# Altium PCB 0.73OLED.PcbDoc
Units mil, origin at the board's own origin, x right, y up, seen from the top; angles counter-clockwise.
Board outline 635 x 1045 mil, 2 copper layers (Top Layer, Bottom Layer); 17 components, 12 nets, 49 pads, 0 vias.
Unrouted connection lines stored in the file: 30.
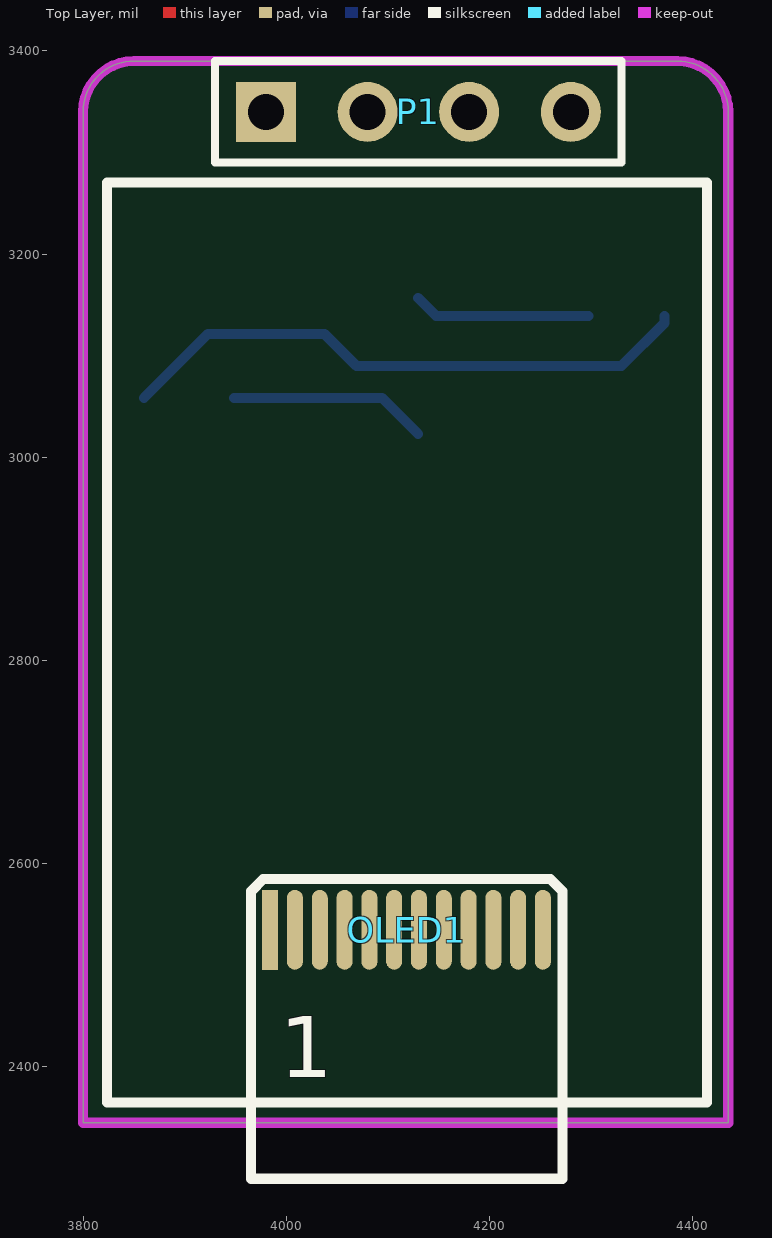
[diagram p0: Top Layer view]
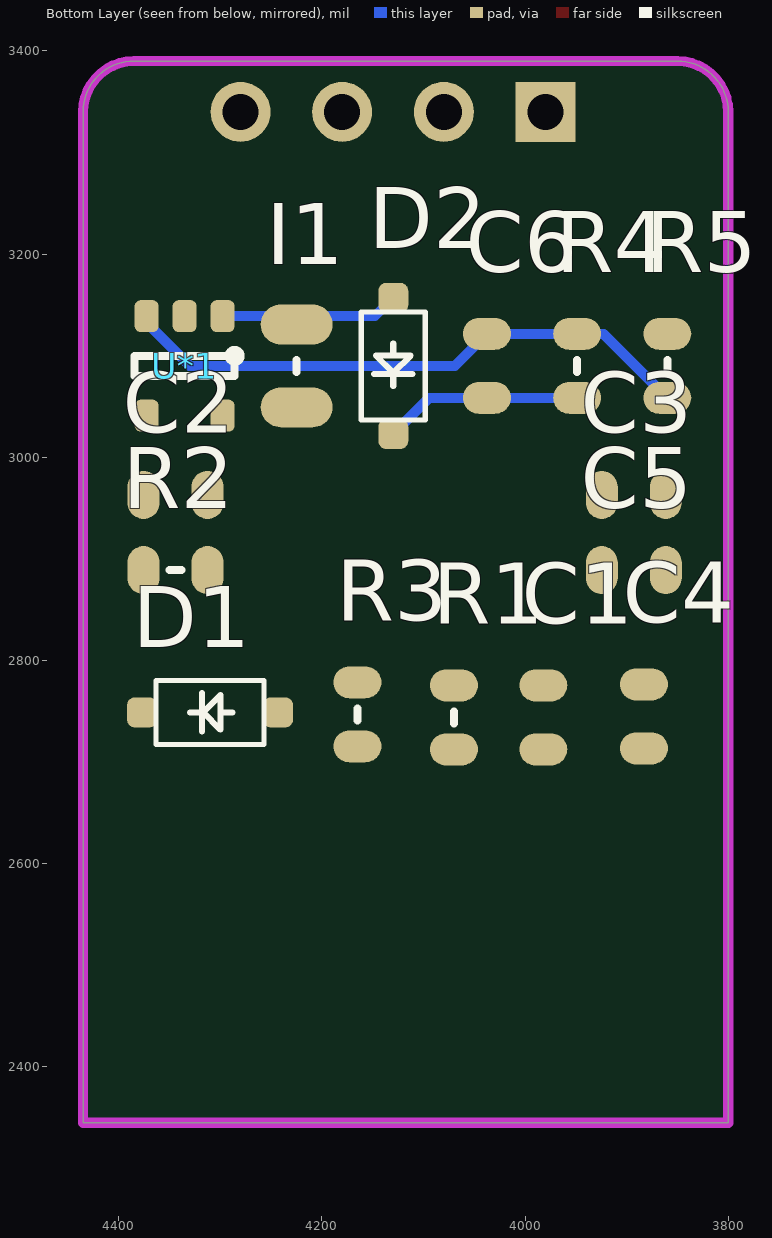
[diagram p1: Bottom Layer view, seen from below]

## Layer stack, top to bottom
Top Solder: solder mask 0.4, Solder Resist, Dk 3.5
Top Layer: signal copper 1.4
Dielectric 1: dielectric 12.6, FR-4, Dk 4.8
Bottom Layer: signal copper 1.4
Bottom Solder: solder mask 0.4, Solder Resist, Dk 3.5

## Board outline
3800,2345 4435,2345 4435,3340 ccw(c4385,3340) 4385,3390 3850,3390 ccw(c3850,3340) 3800,3340

## Design rules (kind name [scope] priority, off if disabled: settings)
Clearance [All] p1: gap=8 ignorepadtopadclearanceinfootprint=FALSE
PolygonConnect [All] p1: connectstyle=Relief reliefconductorwidth=10 reliefentries=4 polygonreliefangle="90 Angle" airgapwidth=10
RoutingVias [All] p1: holewidth=28 width=50 viastyle="Through Hole" minholewidth=28 minwidth=50 maxholewidth=28 maxwidth=50
SolderMaskExpansion [All] p1: expansion=4
Width [All] p1: maxlimit=10 minlimit=10 preferedwidth=10
30 further rules are at their usual default settings.

## Components (designator, comment, footprint, x,y, rotation, side; value= is the part's Value field where it differs from the comment)
C1 "0.1uF" 1__0603-CAP_ 3982,2744 r90 bottom value=104
C2 "4.7uF" 1__0603-CAP_ 4344,2963 r0 bottom value=104
C3 "0.1uF" 1__0603-CAP_ 3893,2963 r180 bottom value=104
C4 "4.7uF" 1__0603-CAP_ 3883,2745 r90 bottom value=104
C5 "4.7uF" 1__0603-CAP_ 3893,2889 r180 bottom value=104
C6 "4.7pF" 1__0603-CAP_ 4037.48,3090 r270 bottom value=104
D1 "Diode" 二极管1206 4310,2749 r180 bottom
D2 "Diode" 二极管1206 4129.7,3090 r90 bottom
I1 "6.8uH" 0805_Ind 4224.8,3090 r90 bottom value=100uH
OLED1 "0.73_OLED" 0.73OLED 4118.39,2260 r0 top
P1 "" HDR1X4 3980,3340 r0 top
R1 "220K" 1__0603-RES_ 4070,2744 r90 bottom value=10K
R2 "510K" 1__0603-RES_ 4344,2889 r0 bottom value=10K
R3 "510K" 1__0603-RES_ 4165,2747 r90 bottom value=10K
R4 "1.43M" 1__0603-RES_ 3948.74,3090 r90 bottom value=10K
R5 "205K" 1__0603-RES_ 3860,3090 r90 bottom value=10K
U*1 "OLED升压" 1__SOT23-5 4335,3090 r270 bottom

## Footprints (in the part's own frame and the unit in brackets; to place one, negate y for a bottom-side part, rotate by r counter-clockwise, add the part's x,y. Pads: shape width x height; smd on the part's side, far side on the other; paste and mask are expansions set on the pad)
0.73OLED [mm]
  rect 0.4x2 smd: 1(-3.41,6.985)
  oval 0.4x2 smd: 2(-2.79,6.985) 3(-2.17,6.985) 4(-1.55,6.985) 5(-0.93,6.985) 6(-0.31,6.985) 7(0.31,6.985) 8(0.93,6.985) 9(1.55,6.985) 10(2.17,6.985) 11(2.79,6.985) 12(3.41,6.985)
  silkscreen extent -7.49,0.76 7.51,25.67
1__0603-CAP_ [mm]
  oval 0.8x1.2 smd: 1(-0.8,0) 2(0.8,0)
  body extent -0.88,-0.48 0.87,0.48, height 0.85
1__0603-RES_ [mm]
  oval 0.8x1.2 smd: 1(-0.8,0) 2(0.8,0)
  silkscreen extent -0.15,0 0.15,0, body extent -0.8,-0.4 0.8,0.4, height 0.45
1__SOT23-5 [mm]
  rrect50% 0.8x0.6 smd: 1(-1.245,0.95) 2(-1.245,0) 3(-1.245,-0.95) 4(1.245,-0.95) 5(1.245,0.95)
  silkscreen extent -0.37,-1.25 0.25,1.37, body extent -1.42,-1.46 1.42,1.46
0805_Ind [mm]
  oval 1x1.8 smd: 1(-1.035,0) 2(1.035,0)
  silkscreen extent -0.15,0 0.15,0, body extent -1,-0.63 1,0.63, height 0.25
HDR1X4 [mm] "Connector; Header; 4 Position"
  rect 1.5x1.5 hole 0.9: 1(0,0)
  round 1.5 hole 0.9: 2(2.54,0) 3(5.08,0) 4(7.62,0)
  silkscreen extent -1.27,-1.27 8.89,1.27
二极管1206 [mm]
  rrect50% 0.75x0.75 smd: 1(1.7,0) 2(-1.7,0)
  silkscreen extent -1.35,-0.8 1.35,0.8

## Part data
C1 C2 C3 C4 C5 C6: library part Cap, "Capacitor"
D1 D2: "Default Diode", Code_JEDEC=DO-214-AB, LatestRevisionDate=17-Jul-2002, LatestRevisionNote="Re-released for DXP Platform.", PackageDescription="DO-214-AB/SMC; 2 C-Bend Leads; Body 7.9 x 5.9 mm, inc. leads (LxW)", PackageReference=SMC, PackageVersion=Sep-1996, Published=8-Jun-2000, Publisher="Altium Limited"
I1: library part 电感
P1: library part "Header 4", "Header, 4-Pin"
R1 R2 R3 R4 R5: library part Res2, "Resistor"
U*1: library part TPS61040

## Nets (pads, with @x,y where several pads share a name; then routed paths per layer and width w, separated by ;. In a path a pad name is that pad's centre, name@x,y a point inside that pad or via, vN(x,y) a via of type N, cw(c..) or ccw(c..) an arc to the next point about the centre after c; other vN are vias at no path point)
GND: C1.2 C2.2 C3.2 C4.2 C5.2 OLED1.3 OLED1.5 OLED1.8 P1.1 R3.2 R5.2 U*1.2
NetC2_1: C2.1 D1.1 OLED1.9 R2.1
NetC3_1: C3.1 C5.1 C6.2 D2.2 OLED1.1 R4.1 | length 195.6
  Bottom Layer w10: R4.1 4094.27,3058.5 D2.2
NetC4_1: C4.1 OLED1.2
NetC6_1: C6.1 R4.2 R5.1 U*1.3 | length 575.7
  Bottom Layer w10: R5.1 3922.99,3121.5 C6.1 4068.98,3090 4330,3090 4372.4,3132.4 U*1.3
NetD1_2: D1.2 R2.2
NetD2_1: D2.1 I1.2 U*1.1 | length 175.3
  Bottom Layer w10: D2.1 4147.62,3139.02 U*1.1
NetOLED1_7: OLED1.7 R3.1
NetOLED1_10: OLED1.10 R1.1
SCL: OLED1.11 P1.3
SDA: OLED1.12 P1.4
VCC: C1.1 I1.1 OLED1.4 OLED1.6 P1.2 R1.2 U*1.4 U*1.5

## Keep-outs
Keep-Out Layer:
  lines w10: 3800,2345 4435,2345 4435,3340 ccw(c4385,3340) 4385,3390 3860,3390 3850,3390 ccw(c3850,3340) 3800,3340 3800,2345

## Silkscreen, mask and mechanical layers (free items; w line width, h text height)
Drill Drawing:
  lines w10: 3800,2345 4435,2345

## Text inside footprints (layer, text, board x,y; h text height)
OLED1: Top Overlay "1" at 3993.39,2390 h60